# EAGLE board M149X (EAGLE 6.6.0)
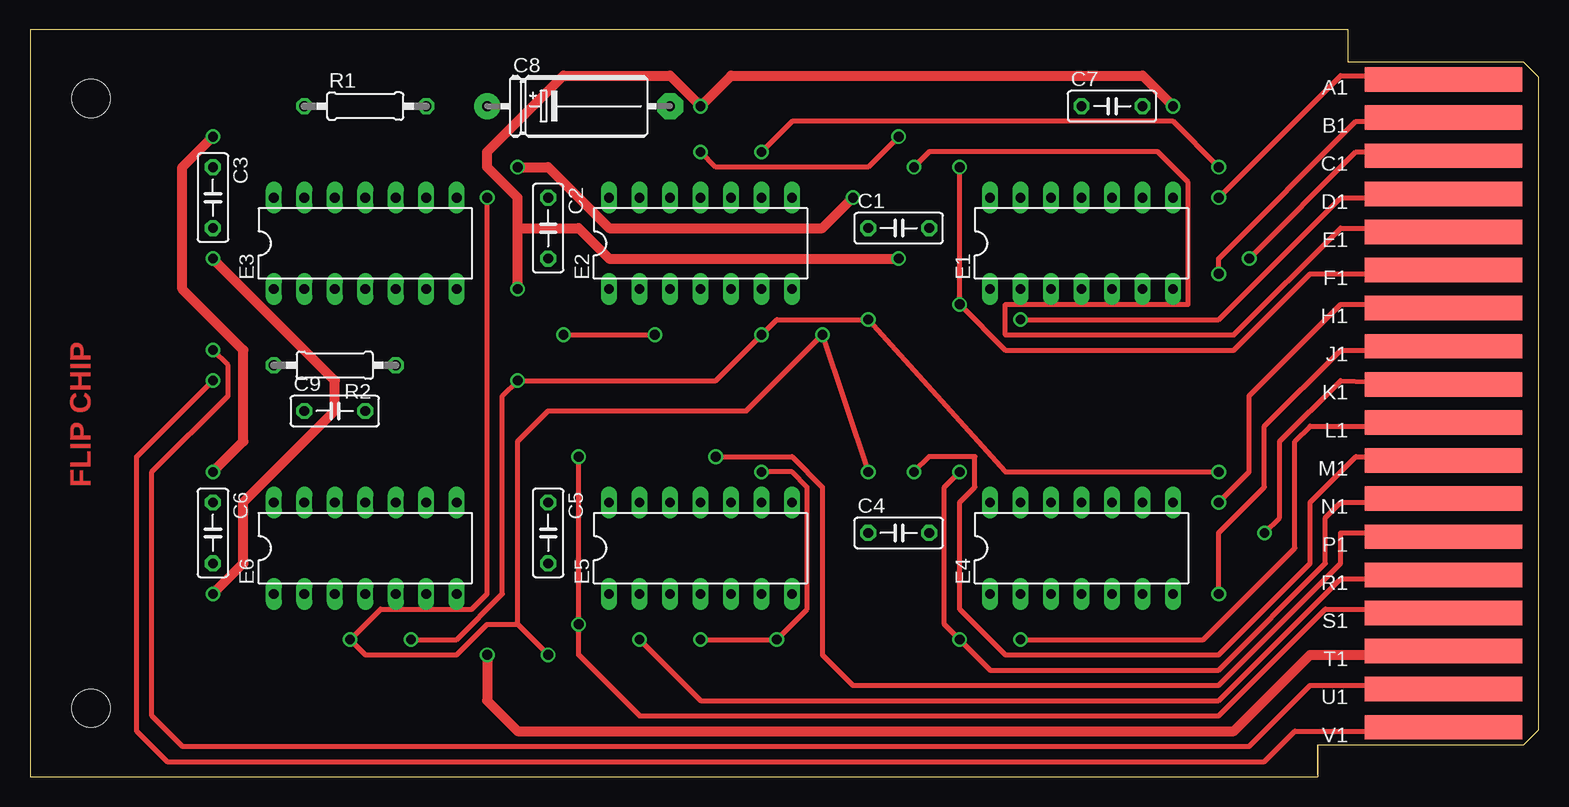
[diagram p0: board, top side]
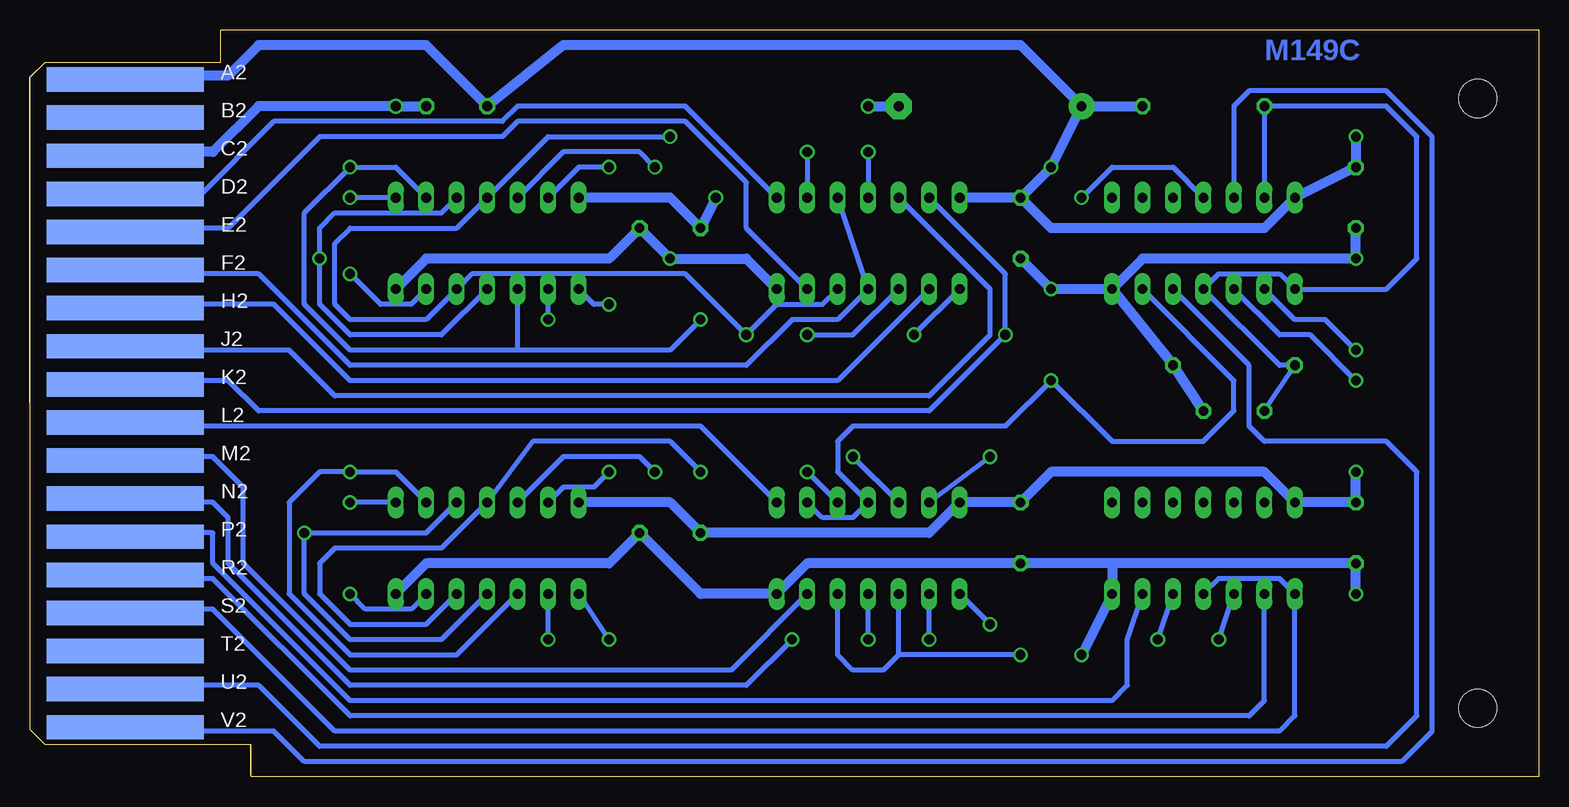
[diagram p1: board, bottom side, seen from below]

Size 125.73 x 62.23 mm. Coordinates in mm from the lower left corner, seen from the top.
Copper layers (1+16): Top 0.035mm / dielectric 1.5mm / Bottom 0.035mm
Design rules "16mils": minimum track width 16mil, minimum drill 32mil, track to track 15mil, track to pad 10mil, pad to pad 10mil, via to via 10mil, smd to smd 10mil, copper to edge 13mil, drill to drill 10mil, minimum pad ring 10mil, minimum via ring 8mil, stop-mask expansion 0mil, vias tented up to drill 0mil, thermal gap 10mil
Net classes: 1 Supply: width 0.813 mm

## Footprints (pad centres in the part's own frame; a part is rotated, then mirrored left to right if it is on the bottom)
C050-025X075 = drill 0.813 octagon: 1 -2.54,0; 2 2.54,0
E15-5 = drill 0.813 pad 2.159: + -7.62,0 | drill 0.813 pad 2.159 octagon: - 7.62,0
DIL14 = drill 0.813 long: 1 -7.62,-3.81; 2 -5.08,-3.81; 3 -2.54,-3.81; 4 0,-3.81; 5 2.54,-3.81; 6 5.08,-3.81; 7 7.62,-3.81; 8 7.62,3.81; 9 5.08,3.81; 10 2.54,3.81; 11 0,3.81; 12 -2.54,3.81; 13 -5.08,3.81; 14 -7.62,3.81
0207/10 = drill 0.813 octagon: 1 -5.08,0; 2 5.08,0
EDGE-CON2 = smd 13.106 x 2.032: A1 7.938,4.128; B1 7.938,7.303; C1 7.938,10.477; D1 7.938,13.652; E1 7.938,16.828; F1 7.938,20.003; H1 7.938,23.177; J1 7.938,26.352; K1 7.938,29.527; L1 7.938,32.703; M1 7.938,35.877; N1 7.938,39.053; P1 7.938,42.227; R1 7.938,45.403; S1 7.938,48.578; T1 7.938,51.752; U1 7.938,54.928; V1 7.938,58.102 | smd 13.106 x 2.032 bottom: A2 7.938,4.128; B2 7.938,7.303; C2 7.938,10.477; D2 7.938,13.652; E2 7.938,16.828; F2 7.938,20.003; H2 7.938,23.177; J2 7.938,26.352; K2 7.938,29.527; L2 7.938,32.703; M2 7.938,35.877; N2 7.938,39.053; P2 7.938,42.227; R2 7.938,45.403; S2 7.938,48.578; T2 7.938,51.752; U2 7.938,54.928; V2 7.938,58.102
SINGLE = hole 3.175: 120.65,56.515; 120.65,5.715

## Placement (x,y rotation side)
C1  .01uf  [C050-025X075]  72.39,45.72 0 top
C2  .01uf  [C050-025X075]  43.18,45.72 270 top
C3  .01uf  [C050-025X075]  15.24,48.26 270 top
C4  .01uf  [C050-025X075]  72.39,20.32 0 top
C5  .01uf  [C050-025X075]  43.18,20.32 270 top
C6  .01uf  [C050-025X075]  15.24,20.32 270 top
C7  .01uf  [C050-025X075]  90.17,55.88 0 top
C8  6.8uf  [E15-5]  45.72,55.88 0 top
C9  .01uf  [C050-025X075]  25.4,30.48 0 top
E1  7401N  [DIL14]  87.63,44.45 0 top
E2  7401N  [DIL14]  55.88,44.45 0 top
E3  7400N  [DIL14]  27.94,44.45 0 top
E4  7401N  [DIL14]  87.63,19.05 0 top
E5  7401N  [DIL14]  55.88,19.05 0 top
E6  7401N  [DIL14]  27.94,19.05 0 top
R1  330  [0207/10]  27.94,55.88 0 top
R2  750  [0207/10]  25.4,34.29 180 top
U$1  [EDGE-CON2]  125.73,62.23 180 top
U$4  OUTLINE-SINGLE  [SINGLE]  125.73,62.23 180 top

## Library data of the parts
C1-C9 R1 R2 = rcl
E1-E6 = 74xx-us
U$1 U$4 = dec-con

## Nets
!U2: E1.3 E1.9 E2.3 E2.9 E3.6 E4.3 E4.9 E5.9 E5.11 E6.5
!V2: E1.5 E1.11 E2.5 E2.11 E3.11 E4.5 E4.11 E5.3 E5.5 E6.3
+3V3: C9.1 E3.1 E3.4 E3.13 R1.1 R2.2
A1: E1.8 U$1.A1
B1: E1.6 U$1.B1
C1: E1.4 E1.10 U$1.C1
D1: E1.2 U$1.D1
D2: E2.8 U$1.D2
E1: E1.12 U$1.E1
E2: E2.6 U$1.E2
F1: E1.1 E1.13 U$1.F1
F2: E2.4 E2.10 U$1.F2
GND [Supply]: C1.2 C2.2 C3.2 C4.2 C5.2 C6.2 C7.2 C8.- C9.2 E1.7 E2.7 E3.7 E4.7 E5.7 E6.7 R2.1 U$1.C2 U$1.T1
H1: E4.8 U$1.H1
H2: E2.2 U$1.H2
J1: E4.6 U$1.J1
J2: E2.12 U$1.J2
K1: E4.4 E4.10 U$1.K1
K2: E2.1 E2.13 U$1.K2
L1: E4.2 U$1.L1
L2: E5.8 U$1.L2
M1: E4.12 U$1.M1
M2: E5.6 U$1.M2
N1: E4.1 E4.13 U$1.N1
N2: E5.4 E5.10 U$1.N2
P1: E5.12 U$1.P1
P2: E6.6 U$1.P2
R1: E5.2 U$1.R1
R2: E6.2 U$1.R2
S1: E5.1 E5.13 U$1.S1
S2: E6.1 E6.4 U$1.S2
U1: E3.2 U$1.U1
U2: E3.5 U$1.U2
V1: E3.3 U$1.V1
V2: E3.12 U$1.V2
VCC [Supply]: C1.1 C2.1 C3.1 C4.1 C5.1 C6.1 C7.1 C8.+ E1.14 E2.14 E3.14 E4.14 E5.14 E6.14 R1.2 U$1.A2

## Tracks (layer width: path | path; a pad name or v marks a point on that pad's centre or on a via)
!U2  (via drill 0.81)
  Top 0.406: v31.75,11.43 35.56,11.43 39.37,15.24 39.37,31.75 v40.64,33.02 57.15,33.02 v60.96,36.83 62.23,38.1 v69.85,38.1 81.28,25.4 v99.06,25.4 | v60.96,52.07 63.5,54.61 95.25,54.61 v99.06,50.8
  Bottom 0.406: v31.75,11.43 E6.5 | E5.9 59.69,21.59 57.15,21.59 E5.11 58.42,25.4 58.42,27.94 57.15,29.21 44.45,29.21 v40.64,33.02 35.56,27.94 27.94,27.94 25.4,30.48 25.4,33.02 E3.6 | E2.3 57.15,36.83 v60.96,36.83 | v60.96,52.07 E2.9 | E1.9 95.25,50.8 v99.06,50.8 102.87,46.99 102.87,39.37 99.06,35.56 85.09,35.56 | 85.09,35.56 E1.3 | v69.85,38.1 72.39,35.56 85.09,35.56 | E4.9 95.25,25.4 v99.06,25.4 101.6,25.4 104.14,22.86 104.14,15.24 99.06,10.16 90.17,10.16 E4.3
!V2  (via drill 0.81)
  Top 0.406: v38.1,48.26 38.1,15.24 36.83,13.97 29.21,13.97 v26.67,11.43 27.94,10.16 35.56,10.16 38.1,12.7 40.64,12.7 | 40.64,12.7 v43.18,10.16 | 40.64,12.7 40.64,27.94 43.18,30.48 59.69,30.48 v66.04,36.83 v69.85,25.4 | v55.88,52.07 57.15,50.8 69.85,50.8 v72.39,53.34
  Bottom 0.406: E3.11 30.48,50.8 35.56,50.8 v38.1,48.26 | v26.67,11.43 E6.3 | E5.5 58.42,10.16 57.15,8.89 54.61,8.89 53.34,10.16 | 53.34,10.16 E5.3 | v43.18,10.16 53.34,10.16 | v55.88,52.07 E2.11 | v72.39,53.34 82.55,53.34 E1.11 90.17,45.72 99.06,45.72 100.33,44.45 100.33,39.37 99.06,38.1 92.71,38.1 E1.5 88.9,41.91 71.12,41.91 v66.04,36.83 63.5,39.37 59.69,39.37 E2.5 | E4.5 92.71,12.7 99.06,12.7 101.6,15.24 101.6,17.78 100.33,19.05 91.44,19.05 E4.11 83.82,27.94 72.39,27.94 v69.85,25.4
+3V3
  Bottom 0.406: E3.13 R1.1 12.7,55.88 10.16,53.34 10.16,43.18 12.7,40.64 E3.1 21.59,41.91 26.67,41.91 E3.4 21.59,34.29 R2.2 C9.1
A1  (via drill 0.81)
  Top 0.406: U$1.A1 111.76,58.42 109.22,58.42 v99.06,48.26
  Bottom 0.406: E1.8 v99.06,48.26
B1  (via drill 0.81)
  Top 0.406: U$1.B1 111.76,54.61 110.49,54.61 99.06,43.18 v99.06,41.91
  Bottom 0.406: E1.6 93.98,39.37 96.52,39.37 v99.06,41.91
C1  (via drill 0.81)
  Top 0.406: U$1.C1 112.09,51.74 111.76,52.07 110.49,52.07 v101.6,43.18
  Bottom 0.406: E1.4 91.44,36.83 99.06,36.83 101.6,39.37 v101.6,43.18 101.6,45.72 100.33,46.99 91.44,46.99 E1.10
D1  (via drill 0.81)
  Top 0.406: U$1.D1 112.06,48.56 111.76,48.26 109.22,48.26 99.06,38.1 v82.55,38.1
  Bottom 0.406: v82.55,38.1 E1.2
D2
  Bottom 0.406: U$1.D2 112.06,48.56 111.76,48.26 105.41,54.61 86.36,54.61 85.09,55.88 71.12,55.88 E2.8
E1  (via drill 0.81)
  Top 0.406: v73.66,50.8 74.93,52.07 93.98,52.07 96.52,49.53 96.52,39.37 81.28,39.37 81.28,36.83 100.33,36.83 109.22,45.72 111.76,45.72 112.09,45.39 U$1.E1
  Bottom 0.406: E1.12 81.28,52.07 74.93,52.07 v73.66,50.8
E2
  Bottom 0.406: E2.6 66.04,45.72 66.04,49.53 71.12,54.61 85.09,54.61 86.36,53.34 101.6,53.34 109.22,45.72 111.76,45.72 U$1.E2
F1  (via drill 0.81)
  Top 0.406: v77.47,50.8 v77.47,39.37 81.28,35.56 100.33,35.56 106.68,41.91 111.76,41.91 112.04,42.19 U$1.F1
  Bottom 0.406: E1.1 78.74,39.37 v77.47,39.37 | v77.47,50.8 80.01,50.8 E1.13
F2
  Bottom 0.406: E2.10 E2.4 58.42,38.1 62.23,38.1 66.04,34.29 99.06,34.29 106.68,41.91 111.76,41.91 U$1.F2
GND  (via drill 0.81)
  Top 0.813: v15.24,15.24 17.78,17.78 17.78,22.86 25.4,30.48 25.4,33.02 v15.24,43.18 | U$1.T1 112.09,10.49 111.76,10.16 106.68,10.16 100.33,3.81 40.64,3.81 38.1,6.35 v38.1,10.16 | v40.64,40.64 40.64,45.72 | 40.64,45.72 40.64,48.26 38.1,50.8 38.1,52.07 44.45,58.42 53.34,58.42 v55.88,55.88 58.42,58.42 92.71,58.42 v95.25,55.88 | v72.39,43.18 48.26,43.18 45.72,45.72 40.64,45.72
  Bottom 0.813: E4.7 92.71,17.78 77.47,17.78 C4.2 69.85,15.24 E5.7 60.96,17.78 C5.2 35.56,17.78 | 35.56,17.78 E6.7 v38.1,10.16 | 35.56,17.78 C6.2 v15.24,15.24 | C3.2 v15.24,43.18 33.02,43.18 E3.7 | C9.2 R2.1 E3.7 | E3.7 v40.64,40.64 C2.2 | v55.88,55.88 C8.- | C7.2 v95.25,55.88 106.68,55.88 110.49,52.07 111.76,52.07 112.09,51.74 U$1.C2 | E1.7 92.71,43.18 77.47,43.18 C1.2 v72.39,43.18 66.04,43.18 E2.7
H1  (via drill 0.81)
  Top 0.406: U$1.H1 111.76,39.37 109.22,39.37 101.6,31.75 101.6,25.4 v99.06,22.86
  Bottom 0.406: E4.8 v99.06,22.86
H2
  Bottom 0.406: E2.2 58.42,33.02 99.06,33.02 105.41,39.37 111.76,39.37 112.09,39.04 U$1.H2
J1  (via drill 0.81)
  Top 0.406: U$1.J1 111.76,35.56 109.22,35.56 102.87,29.21 102.87,24.13 99.06,20.32 v99.06,15.24
  Bottom 0.406: E4.6 93.98,13.97 97.79,13.97 v99.06,15.24
J2
  Bottom 0.406: E2.12 45.72,40.64 45.72,36.83 50.8,31.75 100.33,31.75 104.14,35.56 111.76,35.56 112.09,35.89 U$1.J2
K1  (via drill 0.81)
  Top 0.406: U$1.K1 109.22,33.02 104.14,27.94 104.14,21.59 v102.87,20.32
  Bottom 0.406: E4.4 91.44,11.43 99.06,11.43 102.87,15.24 v102.87,20.32 92.71,20.32 E4.10
K2  (via drill 0.81)
  Top 0.406: v44.45,36.83 v52.07,36.83
  Bottom 0.406: U$1.K2 112.06,32.72 111.76,33.02 109.22,33.02 106.68,30.48 50.8,30.48 v44.45,36.83 44.45,41.91 E2.13 | v52.07,36.83 E2.1
L1  (via drill 0.81)
  Top 0.406: U$1.L1 111.76,29.21 106.68,29.21 105.41,27.94 105.41,19.05 97.79,11.43 v82.55,11.43
  Bottom 0.406: v82.55,11.43 E4.2
L2
  Bottom 0.406: U$1.L2 112.09,29.54 111.76,29.21 69.85,29.21 E5.8
M1  (via drill 0.81)
  Top 0.406: U$1.M1 111.76,26.67 110.49,26.67 106.68,22.86 106.68,17.78 99.06,10.16 81.28,10.16 77.47,13.97 77.47,22.86 78.74,24.13 78.74,26.67 74.93,26.67 v73.66,25.4
  Bottom 0.406: E4.12 81.28,26.67 74.93,26.67 v73.66,25.4
M2
  Bottom 0.406: E5.6 67.31,8.89 99.06,8.89 107.95,17.78 107.95,24.13 110.49,26.67 111.76,26.67 112.09,26.34 U$1.M2
N1  (via drill 0.81)
  Top 0.406: U$1.N1 111.76,22.86 109.22,22.86 107.95,21.59 107.95,17.78 99.06,8.89 80.01,8.89 v77.47,11.43 76.2,12.7 76.2,24.13 v77.47,25.4
  Bottom 0.406: v77.47,11.43 E4.1 | E4.13 81.28,24.13 78.74,24.13 v77.47,25.4
N2  (via drill 0.81)
  Top 0.406: v55.88,11.43 v62.23,11.43 64.77,13.97 64.77,24.13 63.5,25.4 v60.96,25.4
  Bottom 0.406: v55.88,11.43 E5.4 | v60.96,25.4 E5.10 | U$1.N2 111.76,22.86 110.49,22.86 109.22,21.59 109.22,17.78 99.06,7.62 66.04,7.62 v62.23,11.43
P1  (via drill 0.81)
  Top 0.406: U$1.P1 112.09,19.99 111.76,20.32 109.22,20.32 109.22,17.78 99.06,7.62 68.58,7.62 66.04,10.16 66.04,24.13 63.5,26.67 v57.15,26.67
  Bottom 0.406: E5.12 v57.15,26.67
P2
  Bottom 0.406: E6.6 34.29,11.43 34.29,7.62 35.56,6.35 99.06,6.35 110.49,17.78 110.49,20.32 111.76,20.32 U$1.P2
R1  (via drill 0.81)
  Top 0.406: U$1.R1 111.76,16.51 109.22,16.51 99.06,6.35 55.88,6.35 v50.8,11.43
  Bottom 0.406: v50.8,11.43 E5.2
R2
  Bottom 0.406: E6.2 22.86,6.35 24.13,5.08 99.06,5.08 110.49,16.51 111.76,16.51 112.09,16.84 U$1.R2
S1  (via drill 0.81)
  Top 0.406: U$1.S1 111.76,13.97 107.95,13.97 99.06,5.08 50.8,5.08 45.72,10.16 v45.72,12.7 v45.72,26.67
  Bottom 0.406: v45.72,26.67 E5.13 | v45.72,12.7 E5.1
S2
  Bottom 0.406: E6.4 26.67,16.51 21.59,16.51 E6.1 20.32,5.08 21.59,3.81 100.33,3.81 110.49,13.97 111.76,13.97 112.06,13.66 U$1.S2
U1  (via drill 0.81)
  Top 0.406: U$1.U1 111.76,7.62 106.68,7.62 101.6,2.54 12.7,2.54 10.16,5.08 10.16,25.4 16.51,31.75 16.51,34.29 v15.24,35.56
  Bottom 0.406: E3.2 20.32,38.1 17.78,38.1 v15.24,35.56
U2
  Bottom 0.406: U$1.U2 112.12,7.26 111.76,7.62 106.68,7.62 101.6,2.54 12.7,2.54 10.16,5.08 10.16,25.4 12.7,27.94 22.86,27.94 24.13,29.21 24.13,34.29 E3.5
V1  (via drill 0.81)
  Top 0.406: U$1.V1 111.76,3.81 105.41,3.81 102.87,1.27 11.43,1.27 8.89,3.81 8.89,26.67 v15.24,33.02
  Bottom 0.406: E3.3 21.59,36.83 19.05,36.83 v15.24,33.02
V2
  Bottom 0.406: E3.12 25.4,55.88 24.13,57.15 12.7,57.15 8.89,53.34 8.89,3.81 11.43,1.27 102.87,1.27 105.41,3.81 111.76,3.81 U$1.V2
VCC  (via drill 0.81)
  Top 0.813: v40.64,50.8 43.18,50.8 48.26,45.72 66.04,45.72 v68.58,48.26 | v15.24,53.34 12.7,50.8 12.7,40.64 17.78,35.56 17.78,27.94 v15.24,25.4
  Bottom 0.813: U$1.A2 118.12,58.42 109.22,58.42 106.68,60.96 92.71,60.96 C7.1 81.28,60.96 43.18,60.96 C8.+ | C8.+ R1.2 | C2.1 v40.64,50.8 C8.+ | C2.1 E2.14 | C2.1 40.64,45.72 22.86,45.72 E3.14 C3.1 v15.24,53.34 | v68.58,48.26 C1.1 72.39,48.26 E1.14 | v15.24,25.4 C6.1 E6.14 22.86,25.4 40.64,25.4 C5.1 E5.14 50.8,20.32 C4.1 72.39,22.86 E4.14

## Text on the board
Top: FLIP CHIP
Bottom: M149C